# Altium PCB AdcUnitV02.PcbDoc
Units mil, origin at the board's own origin, x right, y up, seen from the top; angles counter-clockwise.
Board outline 9448.82 x 1456.69 mil, 2 copper layers (Top Layer, Bottom Layer); 59 components, 30 nets, 158 pads, 4 vias.
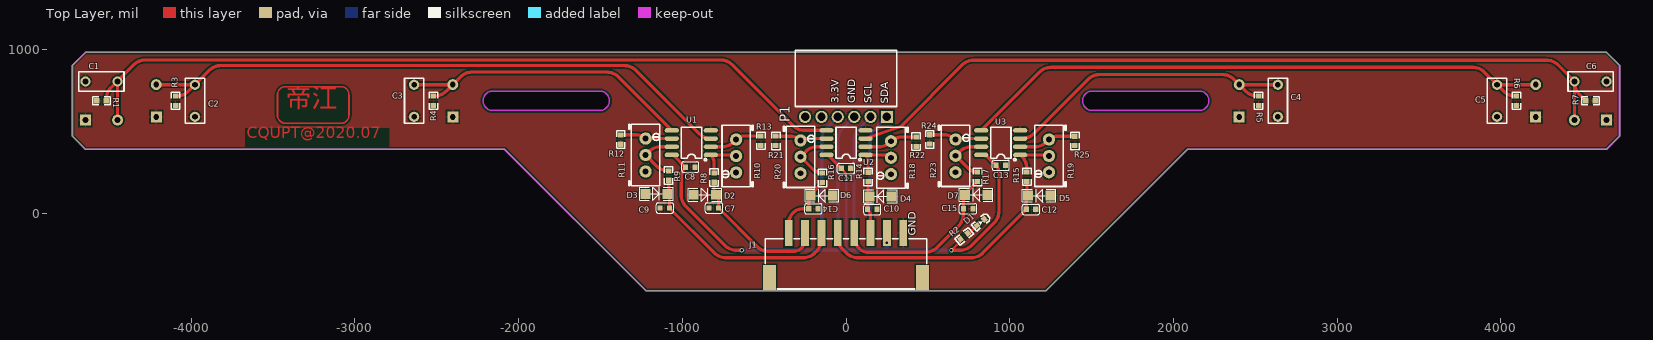
[diagram p0: Top Layer view]
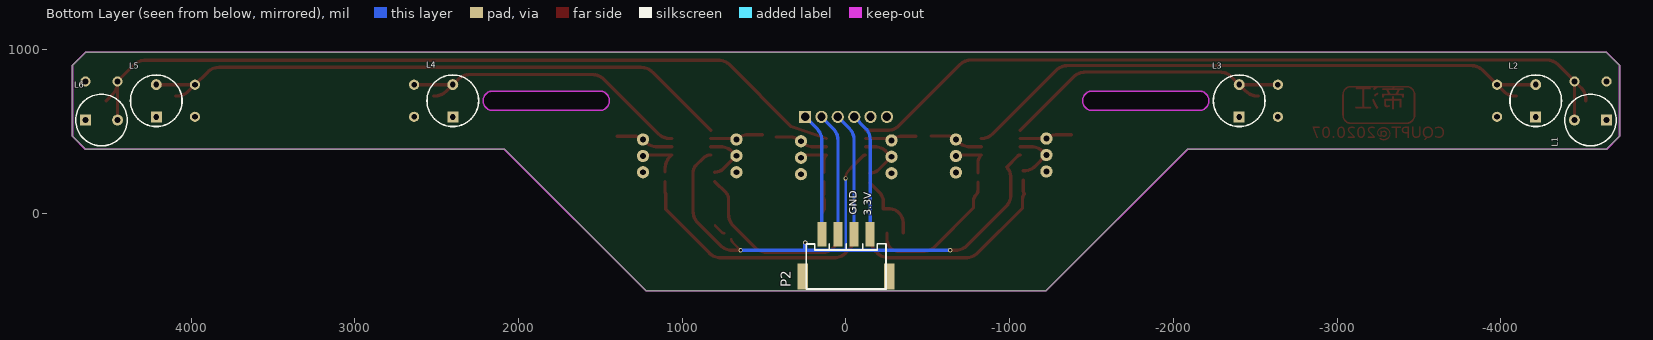
[diagram p1: Bottom Layer view, seen from below]
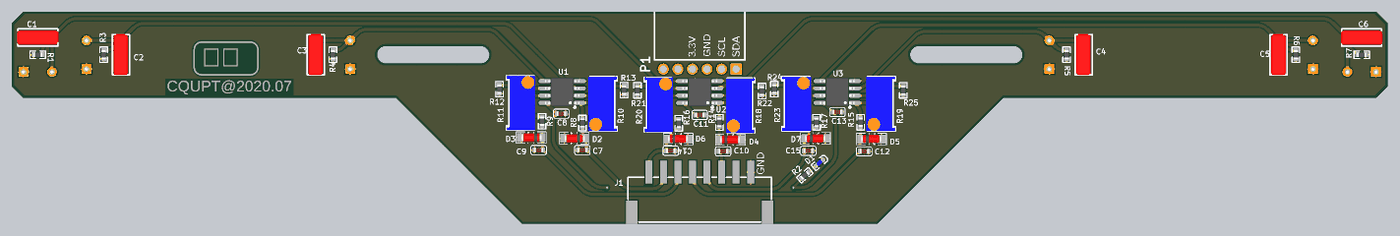
[diagram p2: 3D render of the assembled board from above, using the file's embedded part models]
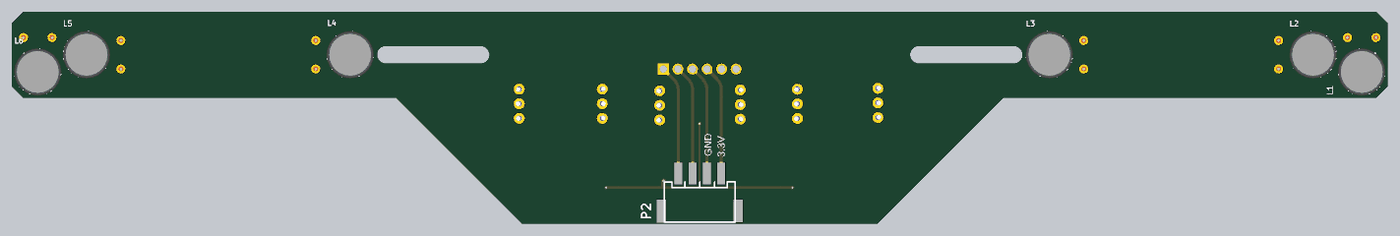
[diagram p3: 3D render of the assembled board from below, using the file's embedded part models]

## Layer stack, top to bottom
Top Solder: solder mask 0.4, Solder Resist, Dk 3.5
Top Layer: signal copper 1.4
Dielectric 1: dielectric 12.6, FR-4, Dk 4.8
Bottom Layer: signal copper 1.4
Bottom Solder: solder mask 0.4, Solder Resist, Dk 3.5

## Board outline
-4645.67,393.7 -4724.41,472.44 -4724.41,905.51 -4645.67,984.25 4645.67,984.25 4724.41,905.51 4724.41,472.44 4645.67,393.7 2086.61,393.7 1220.47,-472.44 -1220.47,-472.44 -2086.61,393.7
cut-out: 1503.94,629.92 2157.48,629.92 ccw(c2157.48,688.98) 2157.48,748.03 1503.94,748.03 ccw(c1503.94,688.98)
cut-out: -2157.48,629.92 -1503.94,629.92 ccw(c-1503.94,688.98) -1503.94,748.03 -2157.48,748.03 ccw(c-2157.48,688.98)

## Design rules (kind name [scope] priority, off if disabled: settings)
Clearance [All] p1: gap=10
PolygonConnect [All] p1: connectstyle=Relief reliefconductorwidth=10 reliefentries=4 polygonreliefangle="90 Angle" airgapwidth=10
RoutingVias [All] p1: holewidth=28 width=50 viastyle="Through Hole" minholewidth=28 minwidth=50 maxholewidth=28 maxwidth=50
SolderMaskExpansion [All] p1: expansion=4
Width [All] p1: maxlimit=3937.01 minlimit=10 preferedwidth=20
30 further rules are at their usual default settings.

## Components (designator, comment, footprint, x,y, rotation, side; value= is the part's Value field where it differs from the comment)
C1 "6.8nF" CAP3 -4547.24,807.09 r180 top
C2 "6.8nF" CAP3 -3976.38,688.98 r270 top
C3 "6.8nF" CAP3 -2637.8,688.98 r270 top
C4 "6.8nF" CAP3 2637.8,688.98 r270 top
C5 "6.8nF" CAP3 3976.38,688.98 r270 top
C6 "6.8nF" CAP3 4547.24,807.09 r0 top
C7 "22uF" CAP_0603 -807,34 r180 top
C8 "104" CAP_0603 -952,284 r180 top
C9 "22uF" CAP_0603 -1107,34 r180 top
C10 "22uF" CAP_0603 161,25 r0 top
C11 "104" CAP_0603 0,275.59 r180 top
C12 "22uF" CAP_0603 1130,25 r0 top
C13 "104" CAP_0603 944.88,295.28 r180 top
C14 "22uF" CAP_0603 -199,29 r0 top
C15 "22uF" CAP_0603 746,29 r0 top
D1 "LED" LED_0603_B 822,-54 r220 top
D2 "ZMM3V3" LL34 -862,115 r0 top
D3 "ZMM3V3" LL34 -1158,120 r0 top
D4 "ZMM3V3" LL34 210.5,105 r180 top
D5 "ZMM3V3" LL34 1180,110 r180 top
D6 "ZMM3V3" LL34 -148,110 r180 top
D7 "ZMM3V3" LL34 795,114 r180 top
J1 "Header" XH2.54-8P 0,-255.91 r0 top
L1 "10mH" Inductor_8x10 -4547.24,570.87 r0 bottom
L2 "10mH" Inductor_8x10 -4212.6,688.98 r90 bottom
L3 "10mH" Inductor_8x10 -2401.57,688.98 r90 bottom
L4 "10mH" Inductor_8x10 2401.57,688.98 r90 bottom
L5 "10mH" Inductor_8x10 4212.6,688.98 r90 bottom
L6 "10mH" Inductor_8x10 4547.24,570.87 r180 bottom
P1 "Header 6" HDR-TH_6P_W 0,590.55 r180 top
P2 "Header 4" XH2.54-4P 0,-255.91 r0 bottom
R1 "100k" RES_0603 -4547.24,688.98 r0 top
R2 "240" RES_0603 722,-139 r220 top
R3 "100k" RES_0603 -4094.49,688.98 r90 top
R4 "100k" RES_0603 -2519.68,688.98 r90 top
R5 "100k" RES_0603 2519.68,688.98 r90 top
R6 "100k" RES_0603 4094.49,688.98 r90 top
R7 "100k" RES_0603 4547.24,688.98 r180 top
R8 "100" RES_0603 -806,220 r270 top
R9 "100" RES_0603 -1083,232.26 r270 top
R10 "100k" RES_POT-3296W -671,351.61 r90 top
R11 "100k" RES_POT-3296W -1224,357.61 r270 top
R12 "240" RES_0603 -1376,452 r90 top
R13 "240" RES_0603 -520,445 r90 top
R14 "100" RES_0603 135,224 r270 top
R15 "100" RES_0603 1105,225 r270 top
R16 "100" RES_0603 -144,218 r270 top
R17 "100" RES_0603 802,224.26 r270 top
R18 "100k" RES_POT-3296W 275,341 r90 top
R19 "100k" RES_POT-3296W 1240.16,352.36 r90 top
R20 "100k" RES_POT-3296W -278,346.61 r270 top
R21 "240" RES_0603 -428,444 r90 top
R22 "240" RES_0603 428,439 r90 top
R23 "100k" RES_POT-3296W 669.29,352.36 r270 top
R24 "240" RES_0603 511.81,452.76 r90 top
R25 "240" RES_0603 1397.64,443.7 r90 top
U1 "LMV358IDR" SOIC-8_150MIL -944.88,433.07 r180 top
U2 "LMV358IDR" SOIC-8_150MIL 0,433.07 r180 top
U3 "LMV358IDR" SOIC-8_150MIL 944.88,433.07 r180 top

## Footprints (in the part's own frame and the unit in brackets; to place one, negate y for a bottom-side part, rotate by r counter-clockwise, add the part's x,y. Pads: shape width x height; smd on the part's side, far side on the other; paste and mask are expansions set on the pad)
CAP3 [mil]
  round 62 hole 35: 1(-97.92,0) 2(97.92,0)
  silkscreen extent -138,-59 138,59, body extent -142,-50 142,48, height 59
CAP_0603 [mm]
  rect 0.8x0.85 smd: 1(-0.73,0) 2(0.73,0)
  silkscreen extent -1.36,-0.8 1.34,0.8, body extent -0.8,-0.4 0.8,0.4, height 0.6
HDR-TH_6P_W [mm]
  rect 1.9x1.9 hole 1.3: 1(-6.35,0)
  round 1.9 hole 1.3: 2(-3.81,0) 3(-1.27,0) 4(1.27,0) 5(3.81,0) 6(6.35,0)
  silkscreen extent -7.87,-10.3 7.87,-1.6
Inductor_8x10 [mm]
  rect 1.7x1.7 hole 0.9: 1(-2.5,0)
  round 1.7 hole 0.9: 2(2.5,0)
  silkscreen extent -4,-4 4,4, body extent -4.15,-4.15 4.15,4.15, height 11.2
LED_0603_B [mm]
  rect 0.8x0.85 smd: A(0.73,0) C(-0.73,0)
  silkscreen extent -1.55,-0.65 1.35,0.65, body extent -0.81,-0.4 0.81,0.4, height 0.6
LL34 [mil]
  rect 60x60 smd: 1(-67.5,0) 2(67.5,0)
  silkscreen extent -102,-40 102,40, body extent -66,-30 71,29, height 59
RES_0603 [mm]
  rect 0.8x0.85 smd: 1(-0.73,0) 2(0.73,0)
  silkscreen extent -1.35,-0.65 1.35,0.65, body extent -0.8,-0.4 0.8,0.4, height 0.38
RES_POT-3296W [mm] "RES-ADJ-TH_3P-L9.5-W4.9-P2.50-L_3296W"
  round 1.9 hole 0.9: 1(-2.55,0) 2(-0.01,0) 3(2.55,0)
  silkscreen extent -4.75,-2.64 4.75,2.2, body extent -4.75,-2.59 4.75,2.41, height 11.5
SOIC-8_150MIL [mm]
  oval 2.2x0.7 smd: 1(-3.023,1.905) 2(-3.023,0.635) 3(-3.023,-0.635) 4(-3.023,-1.905) 5(3.023,-1.905) 6(3.023,-0.635) 7(3.023,0.635) 8(3.023,1.905)
  silkscreen extent -2.37,-2.41 1.55,2.83, body extent -3.03,-2.57 3.03,2.57, height 1.95
XH2.54-4P [mm]
  rect 1.4x3.8 smd: 1(-3.75,-3.283) 2(-1.25,-3.283) 3(1.25,-3.283) 4(3.75,-3.283)
  rect 1.6x4 smd: 5(6.7,3.283) 6(-6.7,3.274)
  silkscreen extent -6.21,-1.81 6.17,5.2
XH2.54-8P [mm]
  rect 1.2x4 smd: 1(-8.9,3.5) 2(-6.35,3.5) 3(-3.81,3.5) 4(-1.27,3.5) 5(1.27,3.5) 6(3.81,3.5) 7(6.35,3.5) 8(8.89,3.5)
  rect 2x4 smd: 9(11.85,-3.5) 10(-11.85,-3.5)
  silkscreen extent -12.5,-5.2 12.5,2.6

## Part data
C1 C2 C3 C4 C5 C6: library part CAP_聚苯电容
C7 C8 C9 C10 C11 C12 C13 C14 C15: library part CAP_0603
D1: library part LED_0603, "发光LED"
J1: library part "Header 2.54_8"
L1 L2 L3 L4 L5 L6: library part Inductor
P1: "Header, 6-Pin"
P2: "Header, 4-Pin"
R1 R2 R3 R4 R5 R6 R7 R8 R9 R12 R13 R14 R15 R16 R17 R21 R22 R24 R25: library part RES_0603
R10 R11 R18 R19 R20 R23: library part RES_POT-3296W, "可调电阻3296W"

## Via types
v1: diameter 25, hole 15, Top Layer to Bottom Layer, tented both sides, 4 vias

## Nets (pads, with @x,y where several pads share a name; then routed paths per layer and width w, separated by ;. In a path a pad name is that pad's centre, name@x,y a point inside that pad or via, vN(x,y) a via of type N, cw(c..) or ccw(c..) an arc to the next point about the centre after c; other vN are vias at no path point)
3V3: P1.4 P2.1 | length 753.3
  Bottom Layer w20: P2.1 -147.64,451.49 cw(c-47.64,451.49) -118.35,522.2 P1.4
GND: C1.2 C2.2 C3.2 C4.2 C5.2 C6.2 C7.2 C8.1 C9.2 C10.2 C11.1 C12.2 C13.1 C14.2 C15.2 D1.C D2.1 D3.1 D4.1 D5.1 D6.1 D7.1 J1.8 L1.1 L2.1 L3.1 L4.1 L5.1 L6.1 R1.1 R3.1 R4.1 R5.1 R6.1 R7.1 R12.1 R13.1 R21.1 R22.1 R24.1 R25.1 U1.4 U2.4 U3.4
LC1: C2.1 L2.2 R3.2 U1.3 | length 3749.6
  Top Layer w20: L2.2 -3977.61,787.4 cw(c-3977.61,785.66) C2.1 ; R3.2 -4086.98,717.72 ccw(c-4086.98,817.72) -4016.27,747.01 C2.1 ; U1.3 cw(c-825.88,557.51) -896.2,487.2 -1283.71,874.71 ccw(c-1354.42,804) -1354.42,904 -3817.85,904 ccw(c-3817.85,804) -3888.56,874.71 C2.1
LC2: C3.1 L3.2 R4.2 U1.5 | length 1884.5
  Top Layer w20: C3.1 -2402.8,786.89 -2442.69,747.01 cw(c-2513.4,817.72) -2513.4,717.72 R4.2 ; L3.2 -2354.27,834.71 cw(c-2283.56,764) -2283.56,864 -1461.23,864 cw(c-1461.23,764) -1390.52,834.71 U1.5
LC3: C6.1 L6.2 R7.2 U2.3 | length 4934.6
  Top Layer w20: U2.3 333.38,531.38 709.71,907.71 cw(c780.42,837) 780.42,937 4277.99,937 cw(c4277.99,837) 4348.7,907.71 C6.1 ; L6.2 4448.82,805.86 cw(c4450.56,805.86) C6.1 ; R7.2 4478.62,728.86 cw(c4549.33,799.57) 4449.33,799.57 C6.1
LC4: C1.1 L1.2 R1.2 U2.5 | length 4929.3
  Top Layer w20: R1.2 -4518.5,699.07 cw(c-4418.5,699.07) -4489.21,769.79 C1.1@-4450.62,808.38 ; L1.2 -4448.82,798.42 cw(c-4420.42,798.42) -4440.5,818.5 -4350.29,908.71 cw(c-4279.58,838) -4279.58,938 -765.42,938 cw(c-765.42,838) -694.71,908.71 -323.36,537.36 ccw(c-252.65,608.07) -252.65,508.07 U2.5
LC5: C4.1 L4.2 R5.2 U3.3 | length 1891.3
  Top Layer w20: U3.3 1075.65,458.07 ccw(c1075.65,558.07) 1146.36,487.36 1478.71,819.71 cw(c1549.42,749) 1549.42,849 2298.56,849 cw(c2298.56,749) 2369.27,819.71 L4.2 ; R5.2 2512.68,717.72 cw(c2512.68,817.72) 2441.97,747.01 L4.2 ; C4.1 2402.8,786.89 cw(c2402.8,788.63) L4.2@2401.58,787.4
LC6: C5.1 L5.2 R6.2 U3.5 | length 3724.1
  Top Layer w20: U3.5 1181.52,863.71 cw(c1252.23,793) 1252.23,893 3828.85,893 cw(c3828.85,793) 3899.56,863.71 C5.1 ; R6.2 4086.98,717.72 cw(c4086.98,817.72) 4016.27,747.01 C5.1 ; L5.2 3977.61,787.4 ccw(c3977.61,785.66) C5.1
NetD1_A: D1.A R2.1 | length 75.1
  Top Layer w15: R2.1 ccw(c744.02,-101.42) 757.52,-114.94 D1.A
NetR8_1: R8.1 R10.2 U1.1 | length 271.4
  Top Layer w20: R8.1 -806,310.07 ccw(c-873.88,310.07) U1.1 -687.56,358.07 cw(c-687.56,334.65) R10.2
NetR9_1: R9.1 R11.2 U1.7 | length 353.4
  Top Layer w20: R9.1 -1085.58,261 cw(c-1085.58,361) -1156.29,290.29 R11.2 -1203.22,378.78 cw(c-1132.51,308.07) -1132.51,408.07 U1.7
NetR10_3: R10.3 R13.2 U1.2 | length 325.6
  Top Layer w20: U1.2 -756.35,408.07 ccw(c-756.35,508.07) -685.64,437.36 R10.3 cw(c-618.51,399.51) -618.51,473.74 R13.2
NetR11_1: R11.1 R12.2 U1.6 | length 318.2
  Top Layer w20: R12.2 -1278.9,480.74 cw(c-1278.9,403.1) R11.1 R11.1 U1.6
NetR14_1: R14.1 R18.2 U2.1 | length 270.3
  Top Layer w20: R14.1 135,319.44 ccw(c80.37,319.44) U2.1 232.83,358.07 cw(c232.83,298.44) R18.2
NetR15_1: R15.1 R19.2 U3.1 | length 295
  Top Layer w20: R15.1 1105,275.53 ccw(c1005,275.53) 1075.71,346.24 U3.1 1225.42,358.07 cw(c1225.42,337.23) R19.2
NetR16_1: R16.1 R20.2 U2.7 | length 352
  Top Layer w20: R16.1 cw(c-144,328.2) -201.6,270.6 R20.2 -246.22,378.78 cw(c-175.51,308.07) -175.51,408.07 U2.7
NetR17_1: R17.1 R23.2 U3.7 | length 345.8
  Top Layer w20: R17.1 cw(c802,332.56) 745.75,276.29 R23.2 695.32,378.78 cw(c766.03,308.07) 766.03,408.07 U3.7
NetR18_3: R18.3 R22.2 U2.2 | length 325.1
  Top Layer w20: U2.2 200.25,408.07 ccw(c200.25,508.07) 270.97,437.36 272.06,438.45 cw(c342.77,367.74) 342.77,467.74 R22.2
NetR19_3: R19.3 R25.2 U3.2 | length 353.2
  Top Layer w20: U3.2 1154.05,408.07 ccw(c1154.05,508.07) 1224.76,437.36 R19.3 cw(c1287.68,405.23) 1287.68,472.44 R25.2
NetR20_1: R20.1 R21.2 U2.6 | length 318.8
  Top Layer w20: R21.2 -340.14,472.74 cw(c-340.14,384.86) R20.1 cw(c-251.27,420.27) -251.27,458.07 U2.6
NetR23_1: R23.1 R24.2 U3.6 | length 323.2
  Top Layer w20: R24.2 599.91,481.5 cw(c599.91,383.37) R23.1 cw(c682.12,439.92) 682.12,458.07 U3.6
OUT1: C7.1 D2.2 J1.2 R8.2 | length 879.8
  Top Layer w20: R8.2 -806,142.76 ccw(c-766.74,142.76) D2.2 cw(c-833.71,75.79) -778.26,75.79 C7.1 -542.55,-201.71 ccw(c-471.84,-131) -471.84,-231 -319.87,-231 ccw(c-319.87,-166.13) -274,-212 ccw(c-331.93,-154.07) -250.01,-154.07 J1.2
OUT2: C9.1 D3.2 J1.3 R9.2 | length 1327
  Top Layer w20: R9.2 -1083,138.11 cw(c-1108.6,138.11) D3.2 cw(c-1120.05,90.45) -1078.26,90.45 C9.1 -803.55,-240.71 ccw(c-732.84,-170) -732.84,-270 -261.42,-270 ccw(c-261.42,-170) -190.71,-240.71 -179.29,-229.29 ccw(c-250.01,-158.58) -150.01,-158.58 J1.3
OUT3: C10.1 D4.2 J1.6 R14.2 | length 323.1
  Top Layer w20: R14.2 135,124.31 ccw(c162.31,124.31) D4.2 ccw(c168.93,79.07) 132.26,79.07 C10.1 cw(c89.44,-17.82) 149.99,-17.82 J1.6
OUT4: C14.1 D6.2 J1.1 R16.2 | length 424.5
  Top Layer w20: J1.1 -350.39,-62.55 cw(c-253.45,-62.55) -322,6 cw(c-266.47,-49.53) -266.47,29 C14.1 -227.74,80.45 cw(c-185.95,80.45) D6.2 cw(c-196.77,110) -210.01,123.25 R16.2
OUT5: C12.1 D5.2 J1.4 R15.2 | length 1537.2
  Top Layer w20: J1.4 -50.01,-147.57 ccw(c49.99,-147.57) -20.72,-218.28 1.71,-240.71 ccw(c72.42,-170) 72.42,-270 764.84,-270 ccw(c764.84,-170) 835.55,-240.71 C12.1 1101.26,119.08 cw(c1114.03,119.08) 1105,128.11 R15.2
OUT6: C15.1 D7.2 J1.5 R17.2 | length 1090.6
  Top Layer w20: J1.5 49.99,-140.57 ccw(c149.99,-140.57) 79.28,-211.28 83,-215 ccw(c133.7,-164.3) 133.7,-236 485.84,-236 ccw(c485.84,-136) 556.55,-206.71 687.97,-75.29 ccw(c617.26,-4.58) 717.26,-4.58 C15.1 717.26,89.28 cw(c769.17,89.28) 732.46,125.98 R17.2
SCL: P1.2 P2.3 | length 754.7
  Bottom Layer w20: P2.3 49.21,448.34 cw(c149.21,448.34) 78.5,519.05 P1.2
SDA: P1.1 P2.4 | length 755.3
  Bottom Layer w20: P2.4 147.64,446.77 cw(c247.64,446.77) 176.93,517.48 P1.1
VCC: C8.2 C11.2 C13.2 J1.7 R2.2 U1.8 U2.8 U3.8 | length 3669.2
  Top Layer w15: C11.2 -19.28,266.13 cw(c-70.66,214.75) v1(2,214.75) ; v1(644,-224) 692.53,-175.47 ccw(c674.53,-157.47) R2.2
  Top Layer w20: U1.8 cw(c-1063.88,336.17) -1048.4,351.66 C8.2 ccw(c-919.76,223.02) -1006,223.02 -1006,112.42 ccw(c-906,112.42) -976.71,41.71 -740.29,-194.71 ccw(c-669.58,-124) -669.58,-224 v1(-637,-224) ; U2.8 cw(c-119,339.29) -105.72,352.57 C11.2 ; v1(644,-224) 696.58,-224 ccw(c696.58,-124) 767.29,-194.71 904.71,-57.29 ccw(c834,13.42) 934,13.42 934,252.16 ccw(c873.03,252.16) C13.2 872.77,338.65 ccw(c825.88,291.77) U3.8
  Bottom Layer w15: 2,-224 v1(2,214.75) ; 249,-219.17 ccw(c255.83,-219.17) 251,-224
  Bottom Layer w20: v1(-637,-224) 2,-224 251,-224 v1(644,-224)
  Bottom Layer w30: 249,-219.17 v1(249,-177)
pads on no net: J1.9 J1.10 P1.3 P1.5 P1.6 P2.2 P2.5 P2.6 R10.1 R11.3 R18.1 R19.1 R20.3 R23.3
copper on no net: | length 2626.5
  Top Layer w10: -3472.44,708.66 -3472.44,602.36 ccw(c-3421.26,602.36) -3421.26,551.18 -3094.49,551.18 ; -3405.51,775.59 -3102.36,775.59 -3085.43,775.59 cw(c-3085.43,725.59) -3035.43,725.59 -3035.43,601.18 cw(c-3085.43,601.18) -3085.43,551.18 -3422.44,551.18 cw(c-3422.44,601.18) -3472.44,601.18 -3472.44,725.59 cw(c-3422.44,725.59) -3422.44,775.59 -3381.89,775.59 ; -3035.43,610.24 -3035.43,708.66
  Bottom Layer w20: -49.21,-126.67 -49.21,449.92 cw(c50.79,449.92) -19.92,520.63 50,590.55

## Polygon pours and split planes (outlines as drawn)
GND on Top Layer "Top Layer-No Net" (solid, remove dead copper, pour order 0): -4724.41,905.51 -4645.67,984.25 4645,984.25 4722.92,907 4724.41,472.44 4645.67,393.7 2086.61,393.7 1220.47,-472.44 -1220.47,-472.44 -2086.61,393.7 -4645.67,393.7 -4722,470.03

## Keep-outs
Keep-Out Layer:
  lines w10: -4724.41,472.44 -4724.41,905.51 -4645.67,984.25 4645.67,984.25 4724.41,905.51 4724.41,472.44 4645.67,393.7 2086.61,393.7 1220.47,-472.44 -1220.47,-472.44 -2086.61,393.7 -4645.67,393.7 -4724.41,472.44 ; -2157.48,629.92 cw(c-2157.48,688.98) -2157.48,748.03 -1503.94,748.03 cw(c-1503.94,688.98) -1503.94,629.92 -2157.48,629.92 ; 1503.94,629.92 cw(c1503.94,688.98) 1503.94,748.03 2157.48,748.03 cw(c2157.48,688.98) 2157.48,629.92 1503.94,629.92

## Other copper
Top Layer:
  text "帝江" at -3421.26,610.24 h200
  text "CQUPT@2020.07" at -3661.42,437.01 h120

## Silkscreen, mask and mechanical layers (free items; w line width, h text height)
Top Overlay:
  text "GND" at 73,675 h80 r90
  text "3.3V" at -29,673 h80 r90
  text "SCL" at 174,673 h80 r90
  text "SDA" at 273,672 h80 r90
  text "GND" at 441,-136 h80 r90
Bottom Overlay:
  text "GND" at -81,-8 h80 r270
  text "3.3V" at -171,-14 h80 r270
Top Paste:
  lines w10: -3472.44,601.18 ccw(c-3422.44,601.18) -3422.44,551.18 -3085.43,551.18 ccw(c-3085.43,601.18) -3035.43,601.18 -3035.43,725.59 ccw(c-3085.43,725.59) -3085.43,775.59 -3389.76,775.59 -3422.44,775.59 ccw(c-3422.44,725.59) -3472.44,725.59 -3472.44,601.18
  text "帝江" at -3421.26,610.24 h200
  text "CQUPT@2020.07" at -3661.42,437.01 h120
Top Solder:
  lines w10: -3472.44,601.18 ccw(c-3422.44,601.18) -3422.44,551.18 -3085.43,551.18 ccw(c-3085.43,601.18) -3035.43,601.18 -3035.43,725.59 ccw(c-3085.43,725.59) -3085.43,775.59 -3303.15,775.59 -3422.44,775.59 ccw(c-3422.44,725.59) -3472.44,725.59 -3472.44,601.18
  text "帝江" at -3421.26,610.24 h200
  text "CQUPT@2020.07" at -3661.42,437.01 h120